# EAGLE board PCB (EAGLE 9.7.0)
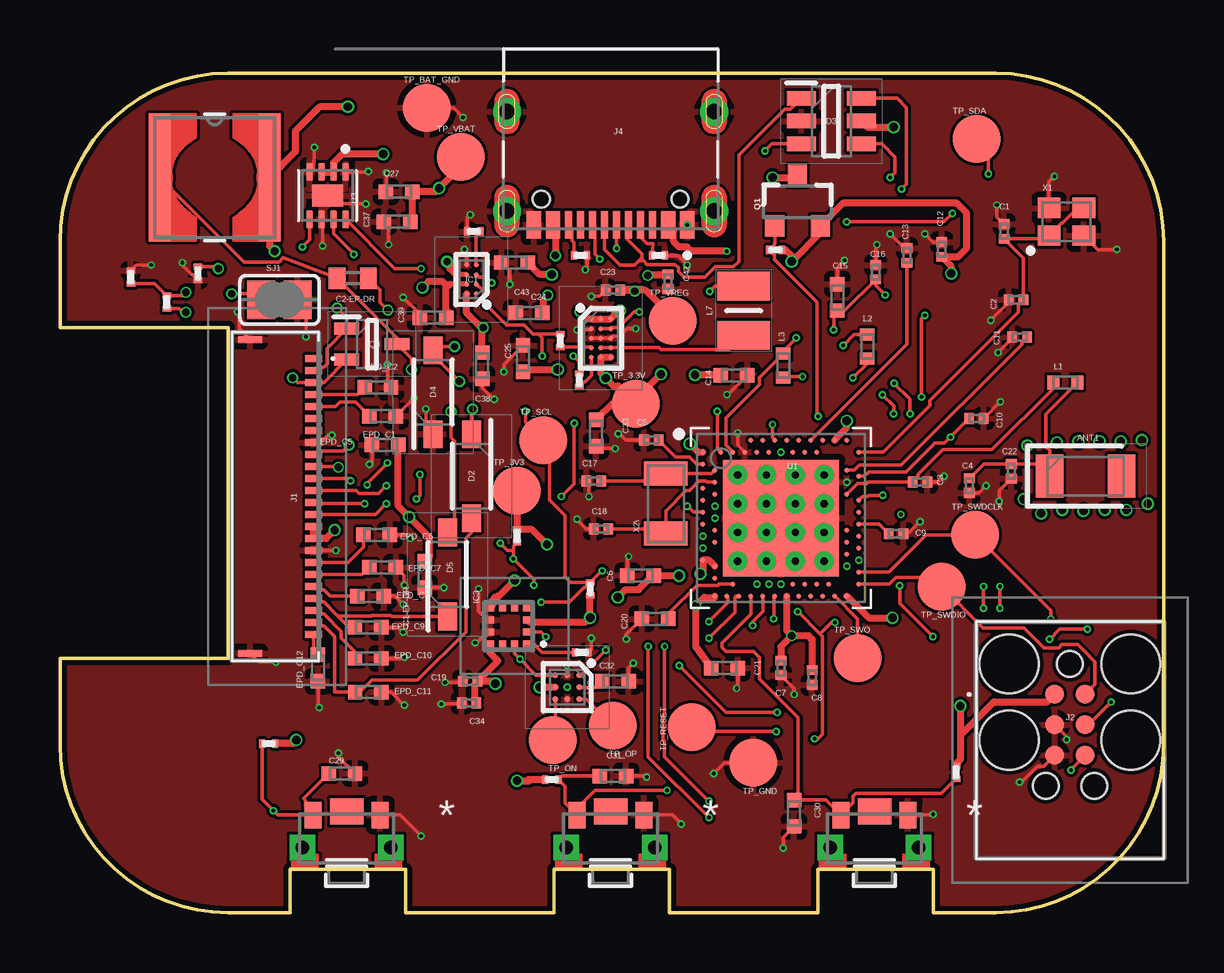
[diagram p0: board, top side]
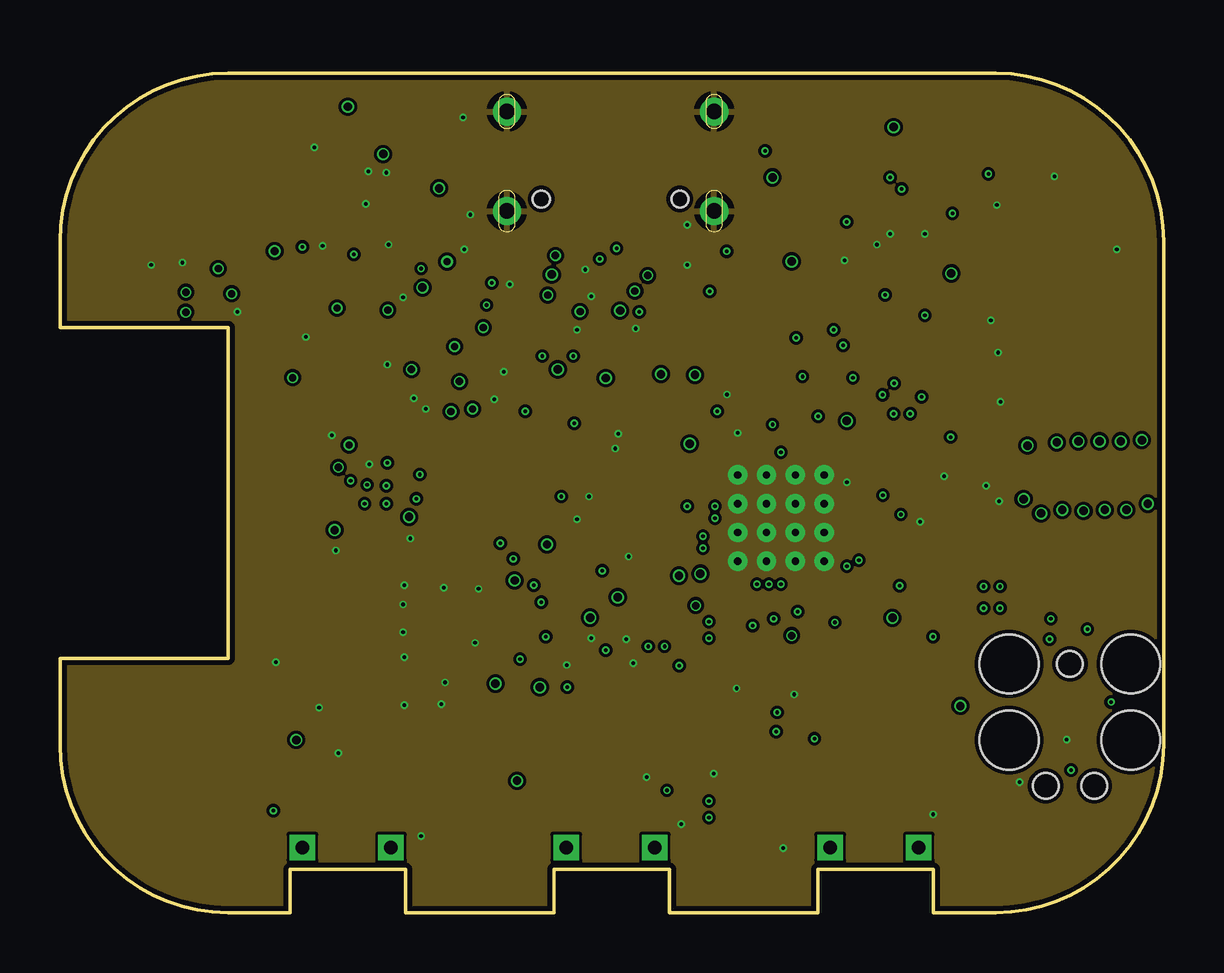
[diagram p1: board, inner layer Route2]
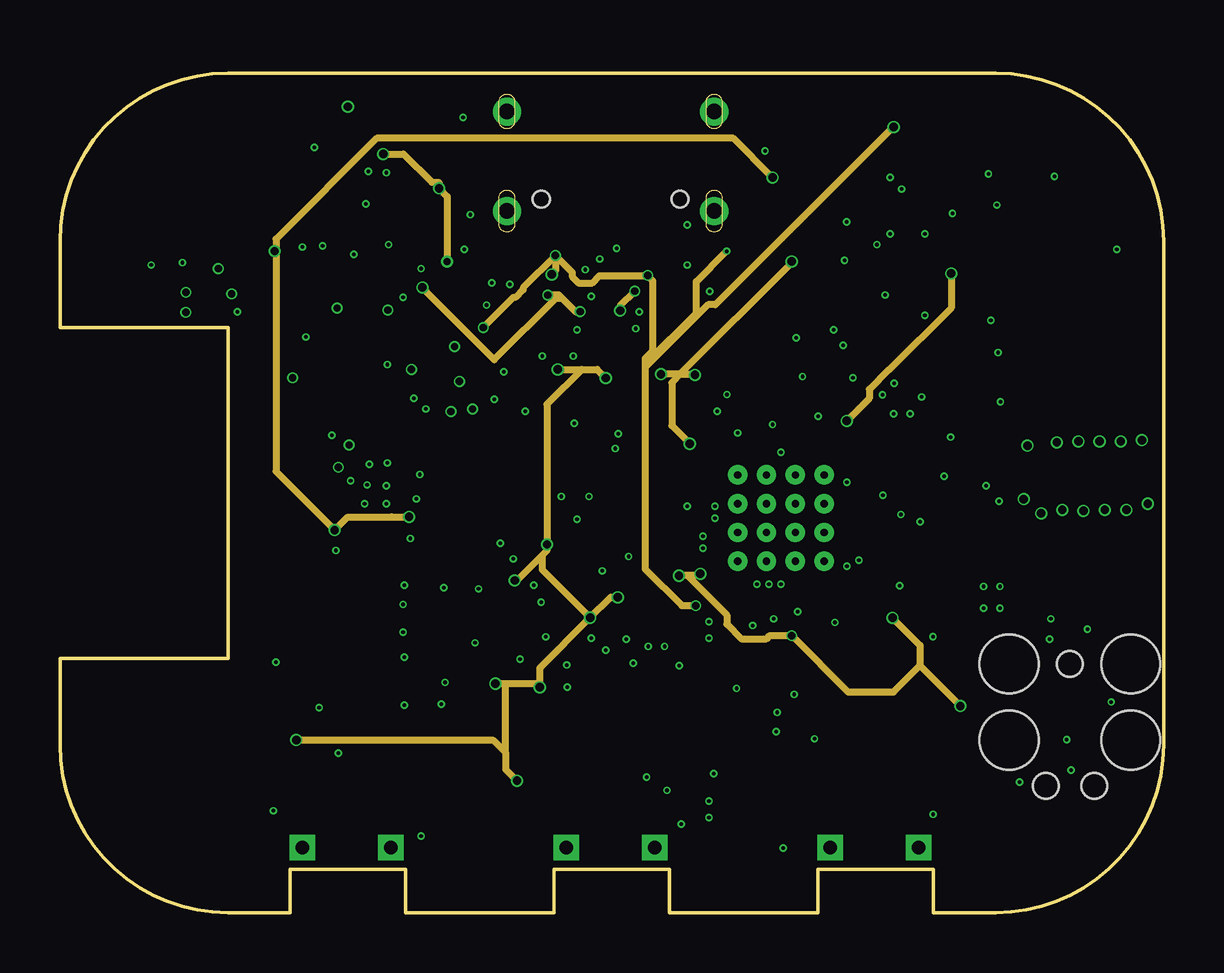
[diagram p2: board, inner layer Route15]
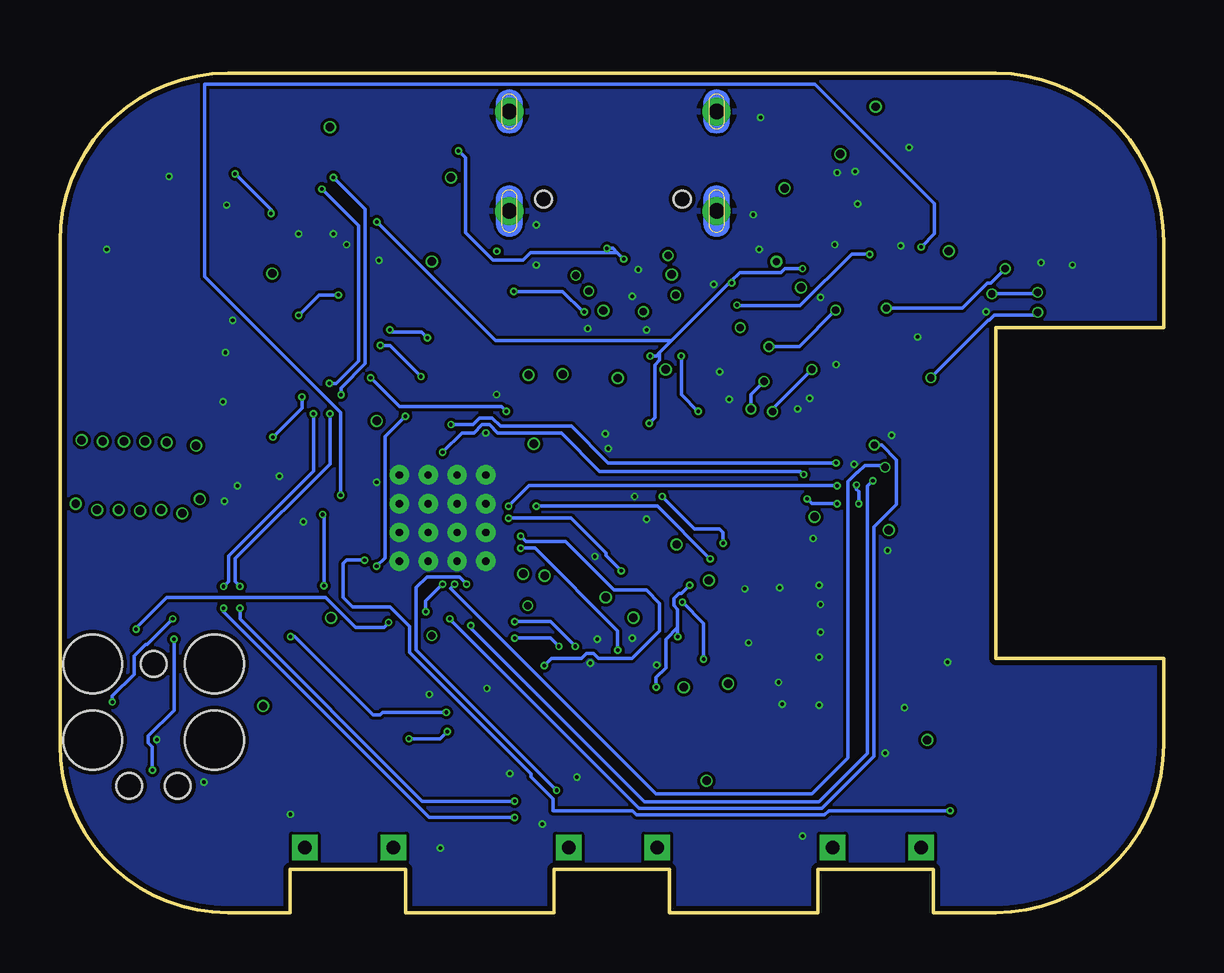
[diagram p3: board, bottom side, seen from below]

Size 46 x 35 mm. Coordinates in mm from the lower left corner, seen from the top.
Outline: 39,0 36.4,0 36.4,1.8 31.6,1.8 31.6,0 25.4,0 25.4,1.8 20.6,1.8 20.6,0 14.4,0 14.4,1.8 9.6,1.8 9.6,0 7,0 arc-90 0,7 0,10.6 7,10.6 7,24.4 0,24.4 0,28 arc-90 7,35 39,35 arc-90 46,28 46,7 arc-90 39,0
Copper layers (1+2*15+16): Top 0.035mm / dielectric 1.6mm / Route2 0.035mm / dielectric 0.15mm / Route15 0.035mm / dielectric 0.2mm / Bottom 0.035mm
Design rules "jlcpcb-2layers.dru *": minimum track width 5mil, minimum drill 0.15mm, track to track 5mil, track to pad 5mil, pad to pad 5mil, via to via 5mil, smd to smd 5mil, copper to edge 0.2mm, drill to drill 6mil, minimum pad ring 10mil, minimum via ring 3mil, stop-mask expansion 4mil, vias tented up to drill 0mil, thermal gap 10mil
Net classes: 1 TRASEEPUTERE: width 0.15 mm

## Footprints (pad centres in the part's own frame; a part is rotated, then mirrored left to right if it is on the bottom)
2450AT18B100E_ANTC3216X140N = smd 1.15 x 1.8: 1 -1.5,0; 2 1.5,0
NORDIC_NRF_3_RESC0201_N = smd 0.4 x 0.45: 1 -0.305,0; 2 0.305,0
NORDIC_NRF_3_RESC0402_N = smd 0.6 x 0.6: 1 -0.55,0; 2 0.55,0
ESP32_C6_LIBRARY_1_ESP32_WROVER_EAGLE-LTSPICE_C0402 = smd 0.7 x 0.9: 1 -0.65,0; 2 0.65,0
ESP32_C6_LIBRARY_5_SOD3716X135N = smd 1.15 x 0.8: 1 -1.75,0; 2 1.75,0
ESP32_C6_LIBRARY_3_SOT95P280X145-6N = smd 1.2 x 0.6: 1 -1.25,0.95; 2 -1.25,0; 3 -1.25,-0.95; 4 1.25,-0.95; 5 1.25,0; 6 1.25,0.95
BQ25180YBGR_BGA8C40P2X4_100X155X50 = smd 0.2 x 0.2: A1 -0.2,0.6; A2 0.2,0.6; B1 -0.2,0.2; B2 0.2,0.2; C1 -0.2,-0.2; C2 0.2,-0.2; D1 -0.2,-0.6; D2 0.2,-0.6
DRV2605YZFR_BGA9C50P3X3_144X144X62 = smd 0.25 x 0.25: A1 -0.5,0.5; A2 0,0.5; A3 0.5,0.5; B1 -0.5,0; B2 0,0; B3 0.5,0; C1 -0.5,-0.5; C2 0,-0.5; C3 0.5,-0.5
BMA423_BMA423 = smd 0.3 x 0.35: 1 -0.75,-0.775; 2 -0.25,-0.775; 3 0.25,-0.775; 4 0.75,-0.775; 7 0.75,0.775; 8 0.25,0.775; 9 -0.25,0.775; 10 -0.75,0.775 | smd 0.35 x 0.3: 5 0.775,-0.25; 6 0.775,0.25; 11 -0.775,0.25; 12 -0.775,-0.25
RT6160AWSC_BGA15C40P3X5_140X230X60 = smd 0.216 x 0.216: A1 -0.4,0.8; A2 0,0.8; A3 0.4,0.8; B1 -0.4,0.4; B2 0,0.4; B3 0.4,0.4; C1 -0.4,0; C2 0,0; C3 0.4,0; D1 -0.4,-0.4; D2 0,-0.4; D3 0.4,-0.4; E1 -0.4,-0.8; E2 0,-0.8; E3 0.4,-0.8
503480-2400_5034802400 = smd 0.3 x 0.7: 1 -5.75,1.525; 2 -5.25,1.525; 3 -4.75,1.525; 4 -4.25,1.525; 5 -3.75,1.525; 6 -3.25,1.525; 7 -2.75,1.525; 8 -2.25,1.525; 9 -1.75,1.525; 10 -1.25,1.525; 11 -0.75,1.525; 12 -0.25,1.525; 13 0.25,1.525; 14 0.75,1.525; 15 1.25,1.525; 16 1.75,1.525; 17 2.25,1.525; 18 2.75,1.525; 19 3.25,1.525; 20 3.75,1.525; 21 4.25,1.525; 22 4.75,1.525; 23 5.25,1.525; 24 5.75,1.525 | smd 0.3 x 1: MP1 -6.54,-1.125; MP2 6.54,-1.125
TC2030-IDC_TC2030IDC = smd 0.783 x 0.783: 1 -0.953,-0.635; 2 -0.953,0.635; 3 0.317,-0.635; 4 0.317,0.635; 5 1.588,-0.635; 6 1.588,0.635 | hole 2.451: -2.223,-2.54; -2.223,2.54; 0.952,-2.54; 0.952,2.54 | hole 1.067: -2.223,0; 2.857,-1.016; 2.857,1.016
KH-TYPE-C-16P_KINGHELM_KH-TYPE-C-16P = smd 0.6 x 1.15: A1_B12 -3.2,4.725; A4_B9 -2.4,4.725; A9_B4 2.4,4.725; A12_B1 3.2,4.725 | smd 0.3 x 1.15: A5 -1.25,4.725; A6 -0.25,4.725; A7 0.25,4.725; A8 1.25,4.725; B5 1.75,4.725; B6 0.75,4.725; B7 -0.75,4.725; B8 -1.75,4.725 | drill 0.65 pad 1.05: SH1 -4.32,0; SH2 4.32,0; SH3 -4.32,4.15; SH4 4.32,4.15 | hole 0.7: -2.89,3.65; 2.89,3.65
NORDIC_NRF_2_RESC0402_L = smd 0.5 x 0.6: 1 -0.5,0; 2 0.5,0
ESP32_C6_LIBRARY_2_IND_4828-WE-TPC_WRE = smd 0.9 x 5.3: 1 -2.286,0; 2 2.286,0
MLP2016SR47MT0S1_INDC2016X100N = smd 1.2 x 2.2: 1 -1.028,0; 2 1.028,0
ESP32_C6_LIBRARY_4_ESP32_C6_LIBRARY_4_ESP32_C6_LIBRARY_4_ESP32_C6_LIBRARY_4_ESP32_WROVER_SPARKFUN-DISCRETESEMI_SOT23-3 = smd 0.8 x 0.9: 1 -0.95,-1; 2 0.95,-1; 3 0,1.1
ESP32_C6_LIBRARY_6_SOT65P210X110-3N = smd 1.05 x 0.5: 1 -1.05,0.65; 2 -1.05,-0.65; 3 1.05,0
CPF0201D7K68C1_0201 = smd 0.35 x 0.25: 1 0,0.275; 2 0,-0.275
ESP32_C6_LIBRARY_7_JUMPER_SJ = smd 1.168 x 1.6: 1 -0.762,0; 2 0.762,0
2025-10-22_07-23-44_LIBRARY_SW_EVP-AKE31A_PAN = smd 0.711 x 1.092: 1 -1.4,-0.972; 2 1.4,-0.972 | drill 0.559 pad 0.914 square: 3 -1.848,0.381; 4 1.848,0.381 | smd 1.397 x 1.092: 5 0,-1.124
HECTOR_WATCH_1_TP20R = smd 2 x 2: TP 0,0
NORDIC_NRF_4_AQFN50P700X700X85_HS-74N = smd 4.85 x 4.85: P$74 0,0 | drill 0.3 pad 0.6: P$75 -1.8,1.8; P$76 -0.6,1.8; P$77 0.6,1.8; P$78 1.8,1.8; P$79 -1.8,0.6; P$80 -0.6,0.6; P$81 0.6,0.6; P$82 1.8,0.6; P$83 -1.8,-0.6; P$84 -0.6,-0.6; P$85 0.6,-0.6; P$86 1.8,-0.6; P$87 -1.8,-1.8; P$88 -0.6,-1.8; P$89 0.6,-1.8; P$90 1.8,-1.8 | smd 0.2 x 0.2: P$A8 -1.25,3.25; P$A10 -0.75,3.25; P$A12 -0.25,3.25; P$A14 0.25,3.25; P$A16 0.75,3.25; P$A18 1.25,3.25; P$A20 1.75,3.25; P$A22 2.25,3.25; P$A23 2.75,3.25; P$AA24 3.25,-2.25; P$AB2 -2.75,-2.5; P$AC5 -2,-2.75; P$AC9 -1,-2.75; P$AC11 -0.5,-2.75; P$AC13 0,-2.75; P$AC15 0.5,-2.75; P$AC17 1,-2.75; P$AC19 1.5,-2.75; P$AC21 2,-2.75; P$AC24 3.25,-2.75; P$AD2 -2.75,-3.25; P$AD4 -2.25,-3.25; P$AD6 -1.75,-3.25; P$AD8 -1.25,-3.25; P$AD10 -0.75,-3.25; P$AD12 -0.25,-3.25; P$AD14 0.25,-3.25; P$AD16 0.75,-3.25; P$AD18 1.25,-3.25; P$AD20 1.75,-3.25; P$AD22 2.25,-3.25; P$AD23 2.75,-3.25; P$B1 -3.25,2.75; P$B3 -2.5,2.75; P$B5 -2,2.75; P$B7 -1.5,2.75; P$B9 -1,2.75; P$B11 -0.5,2.75; P$B13 0,2.75; P$B15 0.5,2.75; P$B17 1,2.75; P$B19 1.5,2.75; P$B24 3.25,2.75; P$C1 -3.25,2.25; P$D2 -2.75,2; P$D23 2.75,2; P$E24 3.25,1.75; P$F2 -2.75,1.5; P$F23 2.75,1.5; P$G1 -3.25,1.25; P$H2 -2.75,1; P$H23 2.75,1; P$J1 -3.25,0.75; P$J24 3.25,0.75; P$K2 -2.75,0.5; P$L1 -3.25,0.25; P$L24 3.25,0.25; P$M2 -2.75,0; P$N1 -3.25,-0.25; P$N24 3.25,-0.25; P$P2 -2.75,-0.5; P$P23 2.75,-0.5; P$R1 -3.25,-0.75; P$R24 3.25,-0.75; P$T2 -2.75,-1; P$T23 2.75,-1; P$U1 -3.25,-1.25; P$U24 3.25,-1.25; P$V23 2.75,-1.5; P$W1 -3.25,-1.75; P$W24 3.25,-1.75; P$Y2 -2.75,-2; P$Y23 2.75,-2
ESP32_C6_LIBRARY_SON50P200X200X80-9N = smd 0.76 x 0.27: 1 -0.985,0.75; 2 -0.985,0.25; 3 -0.985,-0.25; 4 -0.985,-0.75; 5 0.985,-0.75; 6 0.985,-0.25; 7 0.985,0.25; 8 0.985,0.75 | smd 0.9 x 1.3: 9 0,0
NORDIC_NRF_BT-XTAL_2016_N = smd 0.95 x 0.85: 1 -0.725,-0.575; 2 0.725,-0.575; 3 0.725,0.575; 4 -0.725,0.575
NORDIC_NRF_1_XTAL_3215_N = smd 1 x 1.8: 1 -1.25,0; 2 1.25,0

## Placement (x,y rotation side)
ANT1  2450AT18B100E  [2450AT18B100E_ANTC3216X140N]  42.75,18.2 0 top
C1  12pF  [NORDIC_NRF_3_RESC0201_N]  39.35,28.4 90 top
C1-EP-DR  10uF  [NORDIC_NRF_3_RESC0402_N]  15.2,14.1 270 top
C2  12pF  [NORDIC_NRF_3_RESC0201_N]  39.85,25.55 180 top
C2-EP-DR  4.7uF/25V  [ESP32_C6_LIBRARY_1_ESP32_WROVER_EAGLE-LTSPICE_C0402]  12.2,26.45 180 top
C3  1pF  [NORDIC_NRF_3_RESC0201_N]  35.85,17.95 180 top
C4  1pF  [NORDIC_NRF_3_RESC0201_N]  37.9,17.8 90 top
C5  100nF  [NORDIC_NRF_3_RESC0201_N]  24.65,19.7 180 top
C6  1uF  [NORDIC_NRF_3_RESC0402_N]  24.2,14.05 180 top
C7  100nF  [NORDIC_NRF_3_RESC0201_N]  30.05,10.2 270 top
C8  100nF  [NORDIC_NRF_3_RESC0201_N]  31.35,9.8 270 top
C9  820pF  [NORDIC_NRF_3_RESC0201_N]  34.85,15.8 180 top
C10  N.C.  [NORDIC_NRF_3_RESC0201_N]  38.2,20.6 180 top
C11  100pF  [NORDIC_NRF_3_RESC0201_N]  40,24 0 top
C12  100nF  [NORDIC_NRF_3_RESC0201_N]  36.75,27.65 270 top
C13  N.C.  [NORDIC_NRF_3_RESC0201_N]  35.3,27.4 270 top
C14  4.7uF  [NORDIC_NRF_3_RESC0402_N]  28.1,22.4 0 top
C15  1uF  [NORDIC_NRF_3_RESC0402_N]  32.4,25.65 90 top
C16  47nF  [NORDIC_NRF_3_RESC0201_N]  34,26.7 270 top
C17  12pF  [NORDIC_NRF_3_RESC0201_N]  22.25,18 0 top
C18  12pF  [NORDIC_NRF_3_RESC0201_N]  22.55,16 0 top
C19  100nF  [NORDIC_NRF_3_RESC0201_N]  17.1,9.65 0 top
C20  1uF  [NORDIC_NRF_3_RESC0402_N]  24.8,12.25 180 top
C21  1uF  [NORDIC_NRF_3_RESC0402_N]  27.7,10.2 0 top
C22  N.C.  [NORDIC_NRF_3_RESC0201_N]  39.65,18.4 90 top
C23  0.1uF  [NORDIC_NRF_3_RESC0201_N]  23.05,25.95 0 top
C24  10uF  [NORDIC_NRF_3_RESC0402_N]  19.55,25 0 top
C25  22uF  [NORDIC_NRF_3_RESC0402_N]  19.3,23.1 90 top
C27  0.1uF  [NORDIC_NRF_3_RESC0402_N]  14.14,30.05 0 top
C29  1uF  [NORDIC_NRF_3_RESC0402_N]  11.75,5.8 0 top
C30  1uF  [NORDIC_NRF_3_RESC0402_N]  30.6,4.15 90 top
C31  1uF  [NORDIC_NRF_3_RESC0402_N]  23.05,5.7 180 top
C32  1uF  [NORDIC_NRF_3_RESC0402_N]  23.15,9.65 180 top
C33  22uF  [NORDIC_NRF_3_RESC0402_N]  22.35,20 270 top
C34  0.1uF  [NORDIC_NRF_3_RESC0201_N]  17.05,8.75 180 top
C37  1uF  [NORDIC_NRF_3_RESC0402_N]  14.05,28.8 180 top
C38  1uF  [NORDIC_NRF_3_RESC0402_N]  17.6,22.8 270 top
C39  10uF  [NORDIC_NRF_3_RESC0402_N]  15.55,24.8 180 top
C42  0.1uF  [NORDIC_NRF_3_RESC0201_N]  25.35,26.3 270 top
C43  4.7uF  [NORDIC_NRF_3_RESC0402_N]  18.95,27.1 180 top
D2  MBR0530  [ESP32_C6_LIBRARY_5_SOD3716X135N]  17.15,18.2 270 top
D3  USBLC6-2SC6Y  [ESP32_C6_LIBRARY_3_SOT95P280X145-6N]  32.15,33 0 top
D4  MBR0530  [ESP32_C6_LIBRARY_5_SOD3716X135N]  15.55,21.7 90 top
D5  MBR0530  [ESP32_C6_LIBRARY_5_SOD3716X135N]  16.15,14.1 90 top
EPD_C1  1uF/50V  [NORDIC_NRF_3_RESC0402_N]  13.45,20.7 180 top
EPD_C2  1uF/50V  [NORDIC_NRF_3_RESC0402_N]  13.25,21.9 180 top
EPD_C5  0.1uF/50V  [NORDIC_NRF_3_RESC0402_N]  13.55,19.5 0 top
EPD_C6  1uF/50V  [NORDIC_NRF_3_RESC0402_N]  13.2,15.75 180 top
EPD_C7  1uF/50V  [NORDIC_NRF_3_RESC0402_N]  13.45,14.4 180 top
EPD_C8  1uF/50V  [NORDIC_NRF_3_RESC0402_N]  12.95,13.2 180 top
EPD_C9  1uF/50V  [NORDIC_NRF_3_RESC0402_N]  12.85,11.9 180 top
EPD_C10  1uF/50V  [NORDIC_NRF_3_RESC0402_N]  12.85,10.6 180 top
EPD_C11  1uF/50V  [NORDIC_NRF_3_RESC0402_N]  12.85,9.2 180 top
EPD_C12  1uF/50V  [NORDIC_NRF_3_RESC0402_N]  10.75,10.2 90 top
IC1  BQ25180YBGR  [BQ25180YBGR_BGA8C40P2X4_100X155X50]  17.15,26.4 180 top
IC2  DRV2605YZFR  [DRV2605YZFR_BGA9C50P3X3_144X144X62]  21.15,9.4 270 top
IC3  BMA423_BMA423  [BMA423_BMA423]  18.7,11.95 90 top
IC9  RT6160AWSC_RT6160AWSC  [RT6160AWSC_BGA15C40P3X5_140X230X60]  22.55,23.95 0 top
J1  503480-2400  [503480-2400_5034802400]  9.05,17.35 270 top
J2  TC2030-IDC_TC2030-IDCCABLU  [TC2030-IDC_TC2030IDC]  42.1,8.15 270 top
J4  KH-TYPE-C-16P  [KH-TYPE-C-16P_KINGHELM_KH-TYPE-C-16P]  22.95,33.4 180 top
L1  3.9nH  [NORDIC_NRF_2_RESC0402_L]  41.9,22.1 0 top
L2  10uH  [NORDIC_NRF_2_RESC0402_L]  33.65,23.6 90 top
L3  15nH  [NORDIC_NRF_2_RESC0402_L]  30.15,22.8 90 top
L5  68uH  [ESP32_C6_LIBRARY_2_IND_4828-WE-TPC_WRE]  6.45,30.65 0 top
L7  FTC252012SR47MBCA  [MLP2016SR47MT0S1_INDC2016X100N]  28.5,25.1 270 top
Q1  20V/4.2A/52mΩ/1.4W  [ESP32_C6_LIBRARY_4_ESP32_C6_LIBRARY_4_ESP32_C6_LIBRARY_4_ESP32_C6_LIBRARY_4_ESP32_WROVER_SPARKFUN-DISCRETESEMI_SOT23-3]  30.74,29.63 0 top
Q3  SI1308EDL-T1-GE3  [ESP32_C6_LIBRARY_6_SOT65P210X110-3N]  13,23.7 0 top
R1_EP_DR  0.47  [CPF0201D7K68C1_0201]  4.45,25.45 0 top
R1_USB  5K1  [CPF0201D7K68C1_0201]  24.95,27.4 270 top
R2  0  [CPF0201D7K68C1_0201]  21.65,22.2 0 top
R2_EP_DR  10k  [CPF0201D7K68C1_0201]  5.75,26.65 180 top
R2_USB  5K1  [CPF0201D7K68C1_0201]  21.7,27.4 90 top
R3  0  [CPF0201D7K68C1_0201]  21.75,10.85 270 top
R4  0  [CPF0201D7K68C1_0201]  20.85,23.85 0 top
R5  10K  [CPF0201D7K68C1_0201]  37.35,5.85 180 top
R7  10K  [CPF0201D7K68C1_0201]  8.7,7.05 90 top
R8  10K  [CPF0201D7K68C1_0201]  20.5,5.55 270 top
R9  10k  [CPF0201D7K68C1_0201]  17.25,28.4 90 top
R17  3K3  [CPF0201D7K68C1_0201]  22.1,13.5 180 top
R18  3K3  [CPF0201D7K68C1_0201]  19.05,15.7 0 top
R_PWR_EPD  10k  [CPF0201D7K68C1_0201]  29.83,27.63 90 top
R_TYPE_SEL  2.2  [CPF0201D7K68C1_0201]  2.95,26.5 0 top
SJ1  [ESP32_C6_LIBRARY_7_JUMPER_SJ]  9.15,25.55 180 top
SW_DN  2025-10-22_07-23-44_LIBRARY_EVP-AKE31ASW_EVP-AKE31A_PAN  [2025-10-22_07-23-44_LIBRARY_SW_EVP-AKE31A_PAN]  11.95,3.1 180 top
SW_ENT  2025-10-22_07-23-44_LIBRARY_EVP-AKE31ASW_EVP-AKE31A_PAN  [2025-10-22_07-23-44_LIBRARY_SW_EVP-AKE31A_PAN]  22.95,3.1 180 top
SW_UP  2025-10-22_07-23-44_LIBRARY_EVP-AKE31ASW_EVP-AKE31A_PAN  [2025-10-22_07-23-44_LIBRARY_SW_EVP-AKE31A_PAN]  33.95,3.1 180 top
TP_3.3V  HECTOR_WATCH_1_TPTP20R  [HECTOR_WATCH_1_TP20R]  24,21.22 0 top
TP_3V3  HECTOR_WATCH_1_TPTP20R  [HECTOR_WATCH_1_TP20R]  19.05,17.6 0 top
TP_BAT_GND  HECTOR_WATCH_1_TPTP20R  [HECTOR_WATCH_1_TP20R]  15.3,33.55 0 top
TP_GND  HECTOR_WATCH_1_TPTP20R  [HECTOR_WATCH_1_TP20R]  28.9,6.25 180 top
TP_ON  HECTOR_WATCH_1_TPTP20R  [HECTOR_WATCH_1_TP20R]  20.55,7.2 180 top
TP_OP  HECTOR_WATCH_1_TPTP20R  [HECTOR_WATCH_1_TP20R]  23.05,7.8 180 top
TP_RESET  HECTOR_WATCH_1_TPTP20R  [HECTOR_WATCH_1_TP20R]  26.33,7.73 90 top
TP_SCL  HECTOR_WATCH_1_TPTP20R  [HECTOR_WATCH_1_TP20R]  20.15,19.7 0 top
TP_SDA  HECTOR_WATCH_1_TPTP20R  [HECTOR_WATCH_1_TP20R]  38.2,32.25 0 top
TP_SWDCLK  HECTOR_WATCH_1_TPTP20R  [HECTOR_WATCH_1_TP20R]  38.15,15.75 0 top
TP_SWDIO  HECTOR_WATCH_1_TPTP20R  [HECTOR_WATCH_1_TP20R]  36.75,13.6 180 top
TP_SWO  HECTOR_WATCH_1_TPTP20R  [HECTOR_WATCH_1_TP20R]  33.25,10.62 0 top
TP_VBAT  HECTOR_WATCH_1_TPTP20R  [HECTOR_WATCH_1_TP20R]  16.7,31.5 0 top
TP_VREG  HECTOR_WATCH_1_TPTP20R  [HECTOR_WATCH_1_TP20R]  25.55,24.67 0 top
U1  NRF52840_QF  [NORDIC_NRF_4_AQFN50P700X700X85_HS-74N]  30.05,16.45 0 top
U3  MAX17048G+T10  [ESP32_C6_LIBRARY_SON50P200X200X80-9N]  11.15,29.89 270 top
X1  32MHZ  [NORDIC_NRF_BT-XTAL_2016_N]  41.95,28.8 0 top
X2\  32.768kHz  [NORDIC_NRF_1_XTAL_3215_N]  25.25,17.05 270 top

## Library data of the parts
ANT1 = InkTime_v5; ARROW_PART_NUMBER: 2450AT18B100E; ARROW_PRICE-STOCK: https://www.arrow.com/en/products/2450at18b100e/johanson-dielectrics?utm_currency=USD&region=nac; DESCRIPTION: Antennas 2.45GHz ANTENNA; HEIGHT: 1.4mm; MANUFACTURER_NAME: JOHANSON TECHNOLOGY; MANUFACTURER_PART_NUMBER: 2450AT18B100E; MOUSER_PART_NUMBER: 609-2450AT18B100E; MOUSER_PRICE-STOCK: https://www.mouser.co.uk/ProductDetail/Johanson-Technology/2450AT18B100E?qs=yCnrNFeXz%252Bh5MFsFIXGZGA%3D%3D
C1 C1-EP-DR C2-C25 C27 C29-C34 C37-C39 C42 C43 EPD_C1 EPD_C2 EPD_C5-EPD_C12 J2 L1-L3 R1_EP_DR R1_USB R2 R2_EP_DR R2_USB R3-R5 R7-R9 R17 R18 R_PWR_EPD R_TYPE_SEL SJ1 SW_DN SW_ENT SW_UP TP_3.3V TP_3V3 TP_BAT_GND TP_GND TP_ON TP_OP TP_RESET TP_SCL TP_SDA TP_SWDCLK TP_SWDIO TP_SWO TP_VBAT TP_VREG U1 U3 X1 X2\ = InkTime_v5
C2-EP-DR = InkTime_v5; SPICEMODEL: NONE; SPICEPREFIX: C
D2 D4 D5 = InkTime_v5; AVAILABILITY: In Stock; CHECK_PRICES: https://www.snapeda.com/parts/MBR0530/Onsemi/view-part/?ref=eda; DESCRIPTION: Diode Schottky 30 V 500mA Surface Mount SOD-123; MF: ON Semiconductor; MP: MBR0530; PACKAGE: SOD-123-2 ON Semiconductor; PRICE: None; PURCHASE-URL: https://www.snapeda.com/api/url_track_click_mouser/?unipart_id=179458&manufacturer=ON Semiconductor&part_name=MBR0530&search_term=None; SNAPEDA_LINK: https://www.snapeda.com/parts/MBR0530/Onsemi/view-part/?ref=snap
D3 = InkTime_v5; AVAILABILITY: In Stock; CHECK_PRICES: https://www.snapeda.com/parts/USBLC6-2SC6Y/STMicroelectronics/view-part/?ref=eda; DESCRIPTION: 17V Clamp 5A (8/20µs) Ipp Tvs Diode Surface Mount SOT-23-6; MF: STMicroelectronics; MP: USBLC6-2SC6Y; PACKAGE: SOT-23-6 STMicroelectronics; PRICE: None; SNAPEDA_LINK: https://www.snapeda.com/parts/USBLC6-2SC6Y/STMicroelectronics/view-part/?ref=snap
IC1 = InkTime_v5; ARROW_PART_NUMBER: BQ25180YBGR; ARROW_PRICE-STOCK: https://www.arrow.com/en/products/bq25180ybgr/texas-instruments?utm_currency=USD&region=nac; DESCRIPTION: Charger IC Lithium Ion/Polymer, Lithium Iron Phosphate 8-DSBGA (1.6x1.1); HEIGHT: 0.5mm; MANUFACTURER_NAME: Texas Instruments; MANUFACTURER_PART_NUMBER: BQ25180YBGR; MOUSER_PART_NUMBER: 595-BQ25180YBGR; MOUSER_PRICE-STOCK: https://www.mouser.co.uk/ProductDetail/Texas-Instruments/BQ25180YBGR?qs=doiCPypUmgEWjAK%252BJAX6Tw%3D%3D
IC2 = InkTime_v5; ARROW_PART_NUMBER: DRV2605YZFR; ARROW_PRICE-STOCK: https://www.arrow.com/en/products/drv2605yzfr/texas-instruments?region=nac; DESCRIPTION: Haptic Driver for ERM/LRA with Built-In Library and Smart Loop Architecture; HEIGHT: 0.625mm; MANUFACTURER_NAME: Texas Instruments; MANUFACTURER_PART_NUMBER: DRV2605YZFR
IC3 = InkTime_v5; ARROW_PART_NUMBER: BMA423; ARROW_PRICE-STOCK: https://www.arrow.com/en/products/bma423/bosch; DESCRIPTION: Accelerometers Triaxial low-g 12bit Acceleration Sensor; HEIGHT: 1mm; MANUFACTURER_NAME: BOSCH; MANUFACTURER_PART_NUMBER: BMA423; MOUSER_PART_NUMBER: 262-BMA423; MOUSER_PRICE-STOCK: https://www.mouser.co.uk/ProductDetail/Bosch-Sensortec/BMA423?qs=HXFqYaX1Q2xC%252BSgeGoX3mg%3D%3D
IC9 = InkTime_v5; DESCRIPTION: Buck-Boost Regulator Positive Output Step-Up/Step-Down I2C DC-DC Controller IC 15-WL-CSP (BSC) (1.4x2.3); HEIGHT: 0.6mm; MANUFACTURER_NAME: RICHTEK; MANUFACTURER_PART_NUMBER: RT6160AWSC; MOUSER_PART_NUMBER: 835-RT6160AWSC; MOUSER_PRICE-STOCK: https://www.mouser.co.uk/ProductDetail/Richtek/RT6160AWSC?qs=amGC7iS6iy%2FLd9PSoixZXQ%3D%3D
J1 = InkTime_v5; DESCRIPTION: FFC & FPC Connectors 0.5mm FPC RA SMT Dual Contact 24Ckt; HEIGHT: 1.87mm; MANUFACTURER_NAME: Molex; MANUFACTURER_PART_NUMBER: 503480-2400; MOUSER_PART_NUMBER: 538-503480-2400; MOUSER_PRICE-STOCK: https://www.mouser.co.uk/ProductDetail/Molex/503480-2400?qs=OAhjpuo3Vu7efIoxFh9AOw%3D%3D
J4 = InkTime_v5; AVAILABILITY: Not in stock; CHECK_PRICES: https://www.snapeda.com/parts/KH-TYPE-C-16P/Kinghelm/view-part/?ref=eda; MF: kinghelm; MP: KH-TYPE-C-16P; PACKAGE: None; PRICE: None; SNAPEDA_LINK: https://www.snapeda.com/parts/KH-TYPE-C-16P/Kinghelm/view-part/?ref=snap
L5 = InkTime_v5; COPYRIGHT: Copyright (C) 2024 Ultra Librarian. All rights reserved.; MANUFACTURER_PART_NUMBER: 744043680; MFR_NAME: Wurth Electronics
L7 = InkTime_v5; DESCRIPTION: SMD / SMT Inductors (Coils), L=0.47?H, L x W x T :; HEIGHT: 1mm; JLCPCB: https://jlcpcb.com/partdetail/6763488-FTC252012SR47MBCA/C5832368; MANUFACTURER_NAME: TDK; MANUFACTURER_PART_NUMBER: FTC252012SR47MBCA
Q1 = InkTime_v5; PROD_ID: TRAN-14388
Q3 = InkTime_v5; AVAILABILITY: In Stock; CHECK_PRICES: https://www.snapeda.com/parts/SI1308EDL-T1-GE3/Vishay+Siliconix/view-part/?ref=eda; DESCRIPTION: Si1308EDL-T1-GE3 N-channel MOSFET Transistor, 1.5 A, 30 V, 3-Pin SC-70 | Siliconix / Vishay SI1308EDL-T1-GE3; MF: Vishay Siliconix; MP: SI1308EDL-T1-GE3; PACKAGE: SOT-323 Vishay Semiconductor; PRICE: None; PURCHASE-URL: https://www.snapeda.com/api/url_track_click_mouser/?unipart_id=274603&manufacturer=Vishay Siliconix&part_name=SI1308EDL-T1-GE3&search_term=None; SNAPEDA_LINK: https://www.snapeda.com/parts/SI1308EDL-T1-GE3/Vishay+Siliconix/view-part/?ref=snap

## Nets
3V3 [TRASEEPUTERE]: C6.1 C7.1 C8.1 C12.2 C14.1 C19.2 C25.1 C33.1 C34.1 IC2.C2 IC3.3 IC3.7 IC3.10 IC9.E2 IC9.E3 J2.1 Q1.2 R5.2 R7.2 R8.2 R17.1 R18.1 R_PWR_EPD.2 TP_3.3V.TP TP_3V3.TP U1.P$A22 U1.P$AD14 U1.P$AD23 U1.P$B1 U1.P$W1 U1.P$Y2
ALERT: U1.P$J24 U3.5
D_N: D3.6 U1.P$AD4
D_P: D3.4 U1.P$AD6
DN: D3.1 J4.A7 J4.B7
DP: D3.3 J4.A6 J4.B6
EPD_3V3 [TRASEEPUTERE]: C1-EP-DR.1 EPD_C5.2 J1.15 J1.16 L5.2 Q1.3
EPD_BUSY: J1.9 U1.P$AD12
EPD_CS: J1.12 U1.P$K2
EPD_DC: J1.11 U1.P$AD10
EPD_RST: J1.10 U1.P$AC11
GDR: J1.2 Q3.1 R2_EP_DR.2
GND: C1-EP-DR.2 C1.2 C2.2 C3.1 C4.1 C5.2 C6.2 C7.2 C8.2 C9.1 C10.1 C11.1 C12.1 C13.1 C14.2 C15.2 C16.1 C17.1 C18.1 C19.1 C20.2 C21.2 C22.1 C23.1 C24.1 C25.2 C27.1 C29.2 C30.1 C31.1 C32.1 C33.2 C34.2 C37.2 C38.2 C39.2 C42.2 C43.2 D3.2 D4.1 EPD_C1.1 EPD_C2.1 EPD_C5.1 EPD_C6.1 EPD_C7.1 EPD_C8.1 EPD_C9.1 EPD_C10.1 EPD_C11.1 EPD_C12.1 IC1.D2 IC2.B1 IC2.B3 IC3.8 IC3.9 IC9.B1 IC9.C1 IC9.C2 IC9.C3 J1.8 J1.17 J1.MP1 J1.MP2 J2.3 J2.5 J4.A1_B12 J4.A12_B1 J4.SH1 J4.SH2 J4.SH3 J4.SH4 R1_USB.1 R2_EP_DR.1 R2_USB.2 R3.1 R9.1 R_TYPE_SEL.1 SJ1.1 SW_DN.1 SW_ENT.1 SW_UP.1 TP_BAT_GND.TP TP_GND.TP U1.P$74 U1.P$75 U1.P$76 U1.P$77 U1.P$78 U1.P$79 U1.P$80 U1.P$81 U1.P$82 U1.P$83 U1.P$84 U1.P$85 U1.P$86 U1.P$87 U1.P$88 U1.P$89 U1.P$90 U1.P$B7 U1.P$F23 U3.1 U3.4 U3.6 U3.9 X1.2 X1.4
HAPTIC_EN: IC2.A1 U1.P$U1
IMU_INT1: U1.P$N1
IMU_INT2: U1.P$P2
LX1: IC9.B2 IC9.B3 L7.1
LX2: IC9.D2 IC9.D3 L7.2
MOSI: J1.14 U1.P$B13
MU_INT1: IC3.5
MU_INT2: IC3.6
N$1: J4.A5 R1_USB.2
N$2: J4.B5 R2_USB.1
N$3: C3.2 L1.1 U1.P$H23
N$4: ANT1.1 C4.2 C22.2 L1.2
N$6: C2-EP-DR.2 D5.2 L5.1 Q3.3
N$8: C11.2 U1.P$D23
N$10: C1.1 C2.1 U1.P$B24 X1.1 X1.3
N$12: EPD_C6.2 J1.18
N$13: EPD_C7.2 J1.19
N$14: EPD_C8.2 J1.20
N$15: C2-EP-DR.1 D2.1 D4.2
N$17: C9.2 U1.P$N24
N$18: EPD_C2.2 J1.4
N$19: L2.1 U1.P$B3
N$20: EPD_C1.2 J1.5
N$22: R1_EP_DR.1 R_TYPE_SEL.2 SJ1.2
N$23: EPD_C10.2 J1.22
N$25: EPD_C12.2 J1.24
N$28: IC1.D1 R9.2
N$29: IC9.D1 R4.2
N$30: IC9.E1 R2.2
N$31: IC3.1 R3.2
N$32: C5.1 U1.P$C1
N$33: C17.2 U1.P$D2 X2\.1
N$34: C20.1 U1.P$AC5
N$35: C18.2 U1.P$F2 X2\.2
N$39: C32.2 IC2.A2
N$40: L2.2 L3.1
N$41: C10.2 C15.1 C16.2 L3.2 U1.P$B5 U1.P$E24
N$52: C13.2 U1.P$A18
OUT+: IC2.A3 TP_OP.TP
OUT-: IC2.C3 TP_ON.TP
P0.04: U1.P$J1
P0.09: U1.P$L24
P0.13: C30.2 R5.1 SW_UP.2 U1.P$AD8
P0.14: C31.2 R8.1 SW_ENT.2 U1.P$AC9
P0.19: U1.P$AC15
P0.20: U1.P$AD16
P0.21: U1.P$AC17
P0.22: U1.P$AD18
P0.23: U1.P$AC19
P0.24: U1.P$AD20
P0.25: U1.P$AC21
P0.26: U1.P$G1
P0.27: U1.P$H2
P0.28: U1.P$B11
P0.29: U1.P$A10
P0.30: U1.P$B9
P0.31: U1.P$A8
P1.01: Q1.1 R_PWR_EPD.1 U1.P$Y23
P1.02: C29.1 R7.1 SW_DN.2 U1.P$W24
P1.03: U1.P$V23
P1.04: U1.P$U24
P1.05: U1.P$T23
P1.06: U1.P$R24
P1.07: U1.P$P23
P1.09: U1.P$R1
P1.10: U1.P$A20
P1.11: U1.P$B19
P1.12: U1.P$B17
P1.13: U1.P$A16
P1.14: U1.P$B15
P1.15: U1.P$A14
PMIC_IN: IC1.A1
PMIC_INT: U1.P$T2
PREVGH: D5.1 EPD_C9.2 J1.21
PREVGL: D2.2 EPD_C11.2 J1.23
RESE: J1.3 Q3.2 R1_EP_DR.2
RESET: J2.6 TP_RESET.TP U1.P$AC13
SCK: J1.13 U1.P$A12
SCL: IC1.B1 IC2.C1 IC3.12 R4.1 R17.2 TP_SCL.TP U1.P$M2 U3.7
SDA: IC1.C1 IC2.B2 IC3.2 R2.1 R18.2 TP_SDA.TP U1.P$L1 U3.8
SWDCLK: J2.4 TP_SWDCLK.TP U1.P$AA24
SWDIO: J2.2 TP_SWDIO.TP U1.P$AC24
SWO: TP_SWO.TP U1.P$AD22
VBAT [TRASEEPUTERE]: C27.2 C37.1 IC1.C2 TP_VBAT.TP U3.2 U3.3
VBUS [TRASEEPUTERE]: C21.1 C38.1 C42.1 C43.1 D3.5 IC1.A2 J4.A4_B9 J4.A9_B4 U1.P$AD2
VREG [TRASEEPUTERE]: C23.2 C24.2 C39.1 IC1.B2 IC9.A1 IC9.A2 IC9.A3 TP_VREG.TP

## Tracks (layer width: path | path; a pad name or v marks a point on that pad's centre or on a via)
3V3  (via drill 0.3, 0.35)
  Top 0.3: v20.75,22.65 19.4,22.65 C25.1 | TP_3.3V.TP 23.26,21.96 23.07,21.96 v22.75,22.29 22.55,22.49 IC9.E2 IC9.E3 | TP_3.3V.TP 24,21.4 v25.05,22.45 | C14.1 27.38,22.42 v26.47,22.42 | v26.25,19.55 26.6,19.2 U1.P$B1 | v25.8,14.05 C6.1 24.69,14.05 24.11,13.47 23.57,13.47 v23.25,13.15 | v9.85,7.2 9.7,7.05 R7.2 | R8.2 19.52,5.55 19.57,5.5 v19.05,5.5 | IC2.C2 v20,9.4 | v18.15,9.55 18.05,9.65 C19.2 | IC3.3 19.55,12.13 21.93,12.13 v22.1,12.3 R17.1 | v20.3,15.35 19.68,15.97 R18.1 TP_3V3.TP | TP_3.3V.TP 23.02,21.22 C33.1 | R_PWR_EPD.2 30.25,27.63 30.5,27.38 v30.5,27.15 31.69,28.34 Q1.2 32.64,29.58 37.38,29.58 37.8,29.16 37.8,27.7 37.45,27.35 C12.2 37.15,26.95 v37.15,26.65 | U1.P$A22 32.42,19.82 32.42,19.86 32.8,20.23 v32.8,20.5 | U1.P$Y2 27.05,14.7 U1.P$W1 26.8,14.23 v26.7,14.13 | v37.53,8.62 37.53,7.5 | R5.2 37.35,6.21 37.53,6.4 37.53,7.5 | C8.1 31.35,11.4 31.2,11.55 v30.5,11.55 | v30.5,11.55 30.05,11.1 C7.1 | v30.5,11.55 30.3,11.75 U1.P$AD14 | C19.2 18.26,10.5 17.93,10.84 IC3.10 | v18.95,13.85 18.28,13.18 18.18,13.18 18.02,13.01 18.02,12.8 IC3.7 | C34.1 17.27,8.83 17.27,9.52 C19.2 | U1.P$AD23 33.71,12.29 v34.7,12.29 | 37.53,7.5 37.63,7.5 38.93,8.8 41.16,8.8 J2.1
  Route15 0.3: v20.75,22.65 21.75,22.65 | 21.75,22.65 22.39,22.65 v22.75,22.29 | 25.85,22.45 v25.05,22.45 | 25.85,22.45 26.44,22.45 v26.47,22.42 | v26.25,19.55 25.5,20.3 25.5,22.1 25.85,22.45 | 26.15,14.05 v25.8,14.05 | v19.05,5.5 18.57,5.97 18.57,6.67 | v18.15,9.55 18.5,9.55 | 18.5,9.55 19.85,9.55 v20,9.4 20,10.2 v22.1,12.3 | v22.1,12.3 22.95,13.15 v23.25,13.15 | 21.75,22.65 20.3,21.2 v20.3,15.35 20.3,15.1 20.1,14.9 | 25.85,22.45 30.5,27.1 v30.5,27.15 | 32.78,20.58 32.8,20.55 v32.8,20.5 33.73,21.44 33.73,21.82 34.54,22.62 34.56,22.62 37.15,25.21 v37.15,26.65 | v22.1,12.3 20.1,14.3 20.1,14.9 | 20.1,14.9 19.05,13.85 v18.95,13.85 | v34.7,12.29 35.85,11.15 35.85,10.3 | 18.57,6.67 18.57,9.47 18.5,9.55 | 26.15,14.05 27.79,12.4 27.79,12.03 28.41,11.42 29.45,11.42 29.58,11.55 v30.5,11.55 32.85,9.2 34.75,9.2 35.85,10.3 | v26.7,14.13 26.61,14.05 26.15,14.05 | 18.57,6.67 18.04,7.21 11.37,7.21 11.36,7.2 v9.85,7.2 | v37.53,8.62 35.85,10.3
ALERT  (via drill 0.15)
  Top 0.15: v10.1,27.75 10.4,28.05 U3.5 | U1.P$J24 33.45,17.35 33.66,17.35 33.71,17.4 v34.3,17.4
  Bottom 0.15: v10.1,27.75 9.55,28.3 9.55,29.55 14.54,34.54 39.96,34.54 39.96,26.51 34.3,20.85 v34.3,17.4
D_N  (via drill 0.15)
  Top 0.15: D3.6 34.9,33.95 35.28,33.57 35.28,30.37 v35.08,30.17 | v34.77,22.07 35.43,21.4 v35.43,20.8 | v39.18,13.6 v39.18,12.7 | v27.05,3.97 24.52,6.5 v24.52,11.1 | v27.05,12.13 27.85,12.93 27.85,13.15 U1.P$AD4
  Bottom 0.15: v35.08,30.17 33.55,28.63 33.55,23 34.48,22.07 v34.77,22.07 | v35.43,20.8 35.43,18.42 38.98,14.87 38.98,13.8 v39.18,13.6 | v39.18,12.7 39.18,12.54 30.61,3.97 v27.05,3.97 | v24.52,11.1 25.55,12.13 v27.05,12.13
D_P  (via drill 0.15)
  Top 0.15: D3.4 34.25,32.05 34.8,31.5 34.8,30.85 v34.6,30.65 | v34.29,21.59 34.75,21.12 v34.75,20.8 | v38.5,13.6 v38.5,12.7 | v27.05,4.65 25.2,6.5 25.2,7.16 25.13,7.23 25.13,8.23 25.2,8.3 v25.2,11.1 | v27.05,11.45 28.13,12.53 28.13,13.15 28.18,13.2 U1.P$AD6
  Bottom 0.15: v34.6,30.65 33.27,29.32 33.27,22.89 34.29,21.87 v34.29,21.59 | v34.75,20.8 34.75,18.71 38.7,14.76 38.7,13.8 v38.5,13.6 | v38.5,12.7 38.5,12.25 30.9,4.65 v27.05,4.65 | v25.2,11.1 25.55,11.45 v27.05,11.45
DN
  Top 0.15: J4.A7 22.7,27.65 23.35,27 23.95,27 24.12,27.18 | 24.12,27.18 24.25,27.3 24.25,27.45 23.65,28.05 23.65,28.62 J4.B7 | D3.1 30.45,33.5 30.22,33.5 28.3,31.59 28.3,27.15 28.08,26.93 27.32,26.93 26.89,26.5 26,26.5 25.78,26.72 25.78,26.89 25.64,27.02 24.47,27.02 24.31,27.18 24.12,27.18
DP  (via drill 0.15 pad 0.3)
  Top 0.15: v22.5,27.25 22.3,27.45 22.3,28.57 J4.B6 | v23.2,27.7 J4.A6 | D3.3 29.68,32.05 v29.39,31.76
  Bottom 0.15: v22.5,27.25 22.78,27.52 | 22.78,27.52 22.95,27.7 v23.2,27.7 | v29.39,31.76 29.1,31.47 29.1,28.35 27.95,27.2 26.7,27.2 26.38,27.52 22.78,27.52
EPD_3V3  (via drill 0.35)
  Top 0.3: v11.45,15.95 11.1,15.6 J1.16 J1.15 | EPD_C5.2 14.1,16.95 v14.55,16.5 15.4,15.65 15.4,14.85 C1-EP-DR.1 | v12,33.6 10.83,33.6 9.81,32.58 9.81,31.72 L5.2 8.74,27.79 v8.95,27.58 | v29.7,30.65 30.66,30.65 Q1.3
  Route15 0.3: 9,27.45 9,18.4 v11.45,15.95 11.99,16.5 13.83,16.5 v14.55,16.5 | v29.7,30.65 28.07,32.28 13.2,32.28 9,28.08 9,27.45 | v8.95,27.58 8.95,27.5 9,27.45
EPD_BUSY  (via drill 0.15, 0.3)
  Top 0.15: v29.75,12.25 29.75,13.15 U1.P$AD12 | J1.9 10.72,19.25 11.8,19.25 v12.05,19.5
  Bottom 0.15: v12.05,19.5 11.75,19.5 11.13,18.88 11.13,17.02 12.07,16.08 12.07,6.53 14.25,4.35 21.85,4.35 v29.75,12.25
EPD_CS  (via drill 0.15)
  Top 0.15: J1.12 12.35,17.6 12.47,17.48 13.28,17.48 v13.6,17.8
  Bottom 0.15: v13.6,17.8 26.45,17.8 U1.P$K2
  other vias: 27.3,16.95
EPD_DC  (via drill 0.15)
  Top 0.15: v12.12,18.01 12.02,18.1 J1.11 | v28.88,11.97 28.88,12.13 29.3,12.56 U1.P$AD10
  Bottom 0.15: v28.88,11.97 28.88,11.88 21.63,4.63 14.37,4.63 12.35,6.65 12.35,16.85 12.35,17.78 v12.12,18.01
EPD_RST  (via drill 0.15, 0.3)
  Top 0.15: v11.6,18.57 11.57,18.6 J1.10 | U1.P$AC11
  Bottom 0.15: U1.P$AC11 29.72,13.52 21.15,4.95 14.65,4.95 13.15,6.45 13.15,17.98 12.79,18.35 12.75,18.35 12.46,18.64 11.68,18.64 v11.6,18.57
  other vias: 29.55,13.69
GDR  (via drill 0.3)
  Top 0.15: R2_EP_DR.2 6.53,26.93 v6.6,26.85 | v11.55,25.2 11.95,24.8 Q3.1 11.13,23.53 11.13,22.87 11.01,22.75 10.72,22.75 J1.2
  Bottom 0.15: v6.6,26.85 7.2,26.25 7.34,26.25 8.39,25.2 v11.55,25.2
GND  (via drill 0.15)
  Top 0.15: J1.17 v11.5,15.1 | EPD_C6.1 14.45,15.75 v14.6,15.6 | EPD_C10.1 14.3,10.6 v14.35,10.65 | EPD_C9.1 14.1,11.9 v14.3,11.7 | EPD_C8.1 13.95,13.2 v14.3,12.85 | EPD_C7.1 14.35,14.05 v14.35,13.65 | C1-EP-DR.2 v16,13.55 | IC3.8 17.78,12.35 17.67,12.35 17.45,12.56 v17.45,13.5 | C19.1 16.75,9.6 v16.05,9.6 | C34.2 16.7,8.7 v15.9,8.7 | EPD_C11.1 13.8,9.2 v14.35,8.65 | EPD_C12.1 10.75,8.6 v10.8,8.55 | J1.MP2 8.29,10.45 v9,10.45 | SW_DN.1 14.18,4.07 v15.05,3.2 | C29.2 11.6,6.5 v11.6,6.65 | SW_ENT.1 25.53,4.07 v25.9,3.7 | TP_GND.TP 27.7,6.25 v27.25,5.8 | C30.1 30.15,3.15 v30.15,2.7 | C7.2 30.6,9.34 v30.6,9.1 | C21.2 28.25,9.4 v28.2,9.35 | C22.1 39.15,17.6 v39.15,17.15 | C4.1 38.3,17.5 v38.6,17.8 | C3.1 36.6,17.95 v36.85,18.2 | C9.1 35.35,15.8 v35.85,16.3 | C10.1 v39.2,21.3 | C11.1 39.7,23.95 v39.1,23.35 | C2.2 39.55,25.45 v38.8,24.7 | C1.2 39.05,29.01 v39.05,29.5 | X1.4 41.23,30.48 v41.45,30.7 | X1.2 43.25,27.65 v44.05,27.65 | C12.1 36.4,27.96 v36.05,28.3 | C13.1 35.2,27.71 v34.6,28.3 | C16.1 34,27.8 v34.05,27.85 | C15.2 32.4,26.9 v32.7,27.2 | R1_USB.1 25.75,27.4 v26.15,27 | C23.1 22.5,25.7 v22.15,25.7 | IC9.B1 22.1,24.3 v21.55,24.3 | v24,24.35 23.63,24.35 23.32,24.04 23.04,24.04 IC9.C3 IC9.C2 IC9.C1 | C25.2 18.5,22.85 v18.5,22.55 | C38.2 17.6,21.9 v18.1,21.4 | D4.1 15.25,20.25 v15.25,21 | EPD_C1.1 v14.75,21.45 | EPD_C2.1 13.65,22.05 v13.65,22.85 | C39.2 15,24.95 v14.3,25.65 | C37.2 13.7,28.6 v13.7,27.85 | v13.6,30.85 13.6,30.07 C27.1 | U3.1 12.83,30.88 v12.85,30.9 | U3.9 11.49,29.55 v12.75,29.55 | U3.6 10.95,28.86 v10.95,27.8 | SJ1.1 10.25,25.21 v10.25,24 | R2_EP_DR.1 5.53,26.6 5.49,26.6 5.1,26.99 v5.1,27.1 | R_TYPE_SEL.1 3.18,27 v3.8,27 | U3.4 10.56,31.04 10.56,31.32 10.6,31.36 v10.6,31.9
  Top 0.15: TP_BAT_GND.TP 16.4,33.55 v16.8,33.15 | R9.1 16.97,28.98 v17.1,29.1 | IC1.D2 16.95,27.55 v16.85,27.65 | C43.2 18.75,26.75 v18.75,26.2 | R3.1 22.15,10.97 v22.15,11.45 | C20.2 23.6,11.6 v23.6,11.4 | C32.1 23.7,10.2 v23.9,10.4 | C31.1 24.4,5.7 v24.45,5.65 | SW_UP.1 36.37,4.07 v36.4,4.1 | U1.P$B7 28.25,19.5 v28.25,20 | v23.15,19.35 22.45,19.35 C33.2 | C5.2 23.6,19.7 23.33,19.97 v23.27,19.97 | C17.1 22.05,17.9 v22.05,17.35 | C18.1 21.95,16 v21.55,16.4 | C6.2 23.65,14.8 v23.7,14.85 | C14.2 27.85,21.6 v27.8,21.6 | EPD_C5.1 13,18.8 v12.9,18.7 | J2.5 41,6.1 40.75,6.1 40.1,5.45 v40,5.45 | v21.13,10.33 21.15,10.3 IC2.B1 | v7.4,25.05 7.46,24.99 7.46,24.35 J1.MP1 | R2_USB.2 21.97,26.89 v21.9,26.81 | J1.8 10.72,19.75 11.01,19.75 11.16,19.9 v11.33,19.9 | J2.3 41.96,7.33 v41.96,7.22 | U1.P$79 U1.P$80 | U1.P$74 U1.P$85 U1.P$80 | U1.P$74 U1.P$84 | 31.25,16.45 U1.P$82 | U1.P$74 U1.P$90 | U1.P$74 U1.P$78 | U1.P$74 U1.P$81 U1.P$77 | U1.P$74 U1.P$80 | U1.P$80 U1.P$76 | U1.P$74 U1.P$75 | 30.05,15.25 U1.P$88 | U1.P$74 30.05,15.25 | 30.05,15.25 U1.P$89 | U1.P$74 U1.P$87 | U1.P$74 31.25,16.45 | 31.25,16.45 U1.P$86 | U1.P$74 28.85,16.45 U1.P$83
  Top 0.152: IC3.9 17.78,11.55 17.67,11.55 17.36,11.25 v17.3,11.25
  other vias: 32.8,17.95 26.15,28.68
  pour Top: 36.31,1.69 36.33,1.67 36.33,-0.03 36.35,-0.07 39.4,-0.07 40.19,-0.01 40.97,0.14 41.73,0.38 42.45,0.71 43.13,1.12 43.76,1.61 44.33,2.16 44.83,2.79 45.25,3.46 45.59,4.18 45.84,4.93 46,5.71 46.07,6.5 46.17,28.35 46.13,29.15 45.99,29.93 45.77,30.7 45.45,31.43 45.05,32.13 44.57,32.77 44.03,33.34 43.41,33.86 42.74,34.29 42.03,34.65 41.28,34.92 40.5,35.09 39.7,35.18 38.92,35.17 38.92,35.17 38.9,35.17 38.89,35.17 38.89,35.17 16.2,35.12 7,35.07 6.18,35.02 5.37,34.87 4.58,34.63 3.82,34.3 3.11,33.88 2.45,33.39 1.86,32.82 1.33,32.18 0.89,31.49 0.52,30.75 0.25,29.97 0.06,29.17 -0.02,28.35 -0.02,24.38 6.9,24.33 6.92,24.33 6.92,24.33 6.92,24.33 6.93,24.32 6.94,24.31 6.94,24.31 6.94,24.31 6.95,24.3 6.96,24.29 6.96,24.29 6.96,24.29 6.97,24.28 6.98,24.26 6.98,24.26 6.98,24.26 6.98,24.25 6.93,10.75 6.93,10.74 6.93,10.73 6.93,10.73 6.92,10.72 6.91,10.71 6.91,10.71 6.91,10.71 6.9,10.7 6.89,10.69 6.89,10.69 6.89,10.69 6.88,10.68 6.87,10.67 6.87,10.67 6.86,10.67 6.85,10.67 -0.02,10.62 -0.02,10.62 -0.12,6.9 -0.1,6.12 0.01,5.35 0.21,4.6 0.5,3.87 0.87,3.18 1.31,2.54 1.83,1.96 2.4,1.44 3.04,0.98 3.72,0.61 4.44,0.31 5.19,0.1 5.96,-0.02 9.67,-0.07 9.67,1.5 9.67,1.51 9.67,1.51 9.67,1.52 9.68,1.53 9.68,1.54 9.69,1.54 9.69,1.54 9.7,1.55 9.71,1.56 9.71,1.56 9.71,1.56 9.72,1.57 9.73,1.58 9.73,1.58 9.73,1.58 9.75,1.58 14.19,1.68 14.19,1.68 14.2,1.68 14.21,1.68 14.22,1.68 14.22,1.68 14.23,1.67 14.24,1.67 14.24,1.66 14.24,1.66 14.25,1.65 14.26,1.64 14.26,1.64 14.27,1.64 14.27,1.63 14.28,1.62 14.28,1.61 14.28,1.61 14.28,1.6 14.28,1.59 14.28,1.58 14.23,-0.07 20.6,-0.12 20.67,0.02 20.67,1.62 20.69,1.64 20.71,1.66 20.73,1.68 25.2,1.68 25.21,1.68 25.21,1.68 25.22,1.68 25.23,1.67 25.24,1.67 25.24,1.67 25.24,1.66 25.25,1.65 25.26,1.64 25.26,1.64 25.26,1.64 25.27,1.63 25.28,1.62 25.28,1.62 25.28,1.62 25.28,1.6 25.32,-0.07 31.65,-0.07 31.67,0.01 31.67,1.67 31.69,1.69 31.71,1.71 31.73,1.73 36.27,1.73 36.29,1.71
  pour Route2: 6.02,-0.02 6.04,-0.04 6.18,-0.17 9.77,-0.17 9.77,-0.17 9.77,1.37 9.74,1.41 9.72,1.43 9.72,1.47 9.74,1.49 9.76,1.51 9.78,1.53 14.07,1.53 14.11,1.56 14.13,1.58 14.17,1.58 14.19,1.56 14.21,1.54 14.23,1.52 14.23,-0.12 20.72,-0.12 20.72,1.52 20.74,1.54 20.76,1.56 20.78,1.58 25.07,1.58 25.07,1.62 25.09,1.64 25.11,1.66 25.13,1.68 25.17,1.68 25.19,1.66 25.21,1.64 25.23,1.62 25.23,-0.07 31.67,-0.07 31.67,0.02 31.69,0.04 31.71,0.06 31.72,0.07 31.72,1.62 31.74,1.64 31.76,1.66 31.78,1.68 36.17,1.68 36.19,1.66 36.21,1.64 36.23,1.62 36.23,-0.17 39.45,-0.17 40.26,-0.12 41.05,0.02 41.82,0.26 42.56,0.6 43.24,1.02 43.88,1.52 44.44,2.1 44.94,2.74 45.35,3.43 45.67,4.17 45.9,4.95 46.04,5.74 46.07,6.55 46.22,28.7 46.18,29.48 46.05,30.24 45.83,30.98 45.52,31.7 45.12,32.37 44.65,32.98 44.11,33.54 43.51,34.03 42.85,34.45 42.15,34.78 41.42,35.03 40.66,35.18 39.88,35.25 39.12,35.22 39.12,35.22 39.1,35.22 39.09,35.22 39.09,35.22 28.91,35.17 28.91,35.17 28.9,35.17 28.89,35.17 28.88,35.17 24.55,35.27 6.85,35.27 6.02,35.22 5.2,35.07 4.41,34.83 3.65,34.49 2.93,34.06 2.28,33.55 1.69,32.97 1.17,32.31 0.73,31.61 0.39,30.85 0.13,30.06 -0.02,29.24 -0.02,24.23 6.87,24.23 6.89,24.21 6.91,24.19 6.93,24.17 6.93,10.83 6.91,10.81 6.89,10.79 6.87,10.77 -0.07,10.77 -0.17,10.67 -0.17,6.5 -0.12,5.7 0.02,4.9 0.27,4.14 0.6,3.4 1.03,2.72 1.53,2.09 2.11,1.53 2.75,1.04 3.45,0.64 4.19,0.32 4.96,0.1 5.76,-0.02
  pour Bottom: 6.1,-0.17 9.75,-0.17 9.77,-0.09 9.82,1.4 9.82,1.41 9.82,1.42 9.82,1.42 9.83,1.43 9.83,1.44 9.84,1.44 9.84,1.45 9.85,1.45 9.86,1.46 9.86,1.46 9.86,1.47 9.87,1.47 9.88,1.48 9.89,1.48 9.89,1.48 9.9,1.48 14.1,1.53 14.11,1.53 14.11,1.53 14.11,1.53 14.13,1.52 14.14,1.52 14.14,1.52 14.14,1.52 14.15,1.51 14.16,1.5 14.16,1.5 14.16,1.49 14.17,1.48 14.18,1.47 14.18,1.47 14.18,1.47 14.18,1.45 14.27,-0.17 20.66,-0.17 20.77,0.02 20.77,1.52 20.79,1.54 20.81,1.56 20.83,1.58 25.1,1.58 25.11,1.58 25.11,1.58 25.12,1.58 25.13,1.57 25.14,1.57 25.14,1.57 25.14,1.56 25.15,1.55 25.16,1.55 25.16,1.54 25.16,1.54 25.17,1.53 25.18,1.52 25.18,1.52 25.18,1.52 25.18,1.5 25.22,-0.12 31.72,-0.07 31.72,1.57 31.74,1.59 31.76,1.61 31.78,1.63 36.1,1.63 36.11,1.63 36.11,1.63 36.12,1.63 36.13,1.62 36.14,1.62 36.14,1.62 36.14,1.61 36.15,1.6 36.16,1.6 36.16,1.59 36.16,1.59 36.17,1.58 36.18,1.57 36.18,1.57 36.18,1.57 36.18,1.55 36.22,-0.08 39.6,-0.17 40.33,-0.15 41.05,-0.05 41.76,0.14 42.44,0.41 43.08,0.75 43.68,1.16 44.23,1.65 44.72,2.19 45.15,2.78 45.5,3.42 45.78,4.1 45.98,4.8 46.09,5.52 46.12,6.25 46.32,28.4 46.29,29.19 46.16,29.98 45.94,30.74 45.63,31.47 45.24,32.16 44.78,32.81 44.24,33.39 43.65,33.91 42.99,34.36 42.29,34.73 41.55,35.02 40.78,35.21 40,35.32 30.82,35.22 30.81,35.22 30.8,35.22 30.79,35.22 30.78,35.22 24.25,35.27 6.2,35.27 5.44,35.23 4.7,35.09 3.98,34.87 3.28,34.56 2.64,34.16 2.04,33.7 1.5,33.16 1.04,32.56 0.64,31.92 0.33,31.22 0.11,30.5 -0.03,29.76 -0.07,29 -0.12,24.18 6.8,24.18 6.81,24.18 6.82,24.18 6.82,24.18 6.83,24.17 6.84,24.16 6.84,24.16 6.84,24.16 6.85,24.15 6.86,24.14 6.86,24.14 6.86,24.14 6.87,24.13 6.88,24.12 6.88,24.12 6.88,24.12 6.88,24.1 6.93,10.87 6.93,10.86 6.93,10.85 6.93,10.84 6.93,10.83 6.93,10.83 6.92,10.82 6.91,10.81 6.91,10.81 6.91,10.81 6.9,10.8 6.89,10.79 6.89,10.79 6.89,10.79 6.88,10.78 6.87,10.77 6.87,10.77 6.86,10.77 6.85,10.77 6.84,10.77 6.83,10.77 -0.06,10.82 -0.17,10.67 -0.22,5.95 -0.18,5.19 -0.05,4.45 0.17,3.73 0.49,3.04 0.88,2.39 1.36,1.8 1.9,1.27 2.51,0.82 3.16,0.44 3.86,0.15 4.59,-0.05 5.34,-0.16
HAPTIC_EN  (via drill 0.15)
  Top 0.15: v22.75,10.95 21.7,9.9 IC2.A1
  Bottom 0.15: U1.P$U1 26.2,15.2 22.75,11.75 v22.75,10.95
  other vias: 26.8,15.2
LX1  (via drill 0.15)
  Top 0.15: IC9.B2 IC9.B3 23,24.4 23.29,24.4 23.94,25.05 v24.14,25.05 | v27.08,25.9 27.31,26.13 L7.1
  Bottom 0.15: v27.08,25.9 25.05,25.9 24.2,25.05 v24.14,25.05
LX2
  Top 0.15: IC9.D2 IC9.D3 24.97,23.55 25.05,23.47 27.89,23.47 L7.2
MOSI  (via drill 0.15)
  Top 0.15: v14.85,17.25 15,17.4 v15,18.27 | v13.6,17.05 13.15,16.6 J1.14
  Bottom 0.15: v14.85,17.25 14.65,17.05 v13.6,17.05 | v15,18.27 15.13,18.4 23.5,18.4 25.1,20 27.75,20 28.1,20.35 28.4,20.35 28.75,20 29.25,20 U1.P$B13
  other vias: 30.05,19.2
N$1
  Top 0.15: R1_USB.2 24.73,27.9 24.47,27.9 24.2,28.16 J4.A5
N$2
  Top 0.15: J4.B5 21.35,28.53 21.35,28.02 21.43,27.94 R2_USB.1
N$3
  Top 0.15: L1.1 41.4,21.85 38.85,19.3 36.79,19.3 35.75,18.26 35.75,18.16 C3.2 33.68,17.95 33.62,17.9 33.25,17.9 U1.P$H23
N$4
  Top 0.15: C4.2 38.5,18.71 C22.2 40.75,18.71 ANT1.1 41.25,19.26 41.1,19.42 41.1,20.8 L1.2
N$6  (via drill 0.3)
  Top 0.15: L5.1 7.69,27.13 9.14,27.13 9.31,27.3 C2-EP-DR.2 14.05,23.95 Q3.3 14.65,23.1 v14.65,22.65 | D5.2 16.45,16.15 16.45,19.66 16.29,19.82 v16.29,20.9
  Bottom 0.15: v14.65,22.65 16.2,21.1 16.2,20.99 v16.29,20.9
N$8
  Top 0.15: C11.2 40.1,23.79 40.1,23.69 35.06,18.65 33.33,18.65 33.12,18.45 U1.P$D23
N$9  (via drill 0.35)
  other vias: 45.1,19.7
N$10
  Top 0.15: X1.3 42.41,29.38 41.78,28.75 41.75,28.75 X1.1 41.1,28.1 C1.1 40.16,27.29 C2.1 39.95,25.34 39.95,25.03 36.27,21.35 36.27,21.13 34.33,19.2 U1.P$B24
N$11  (via drill 0.35)
  other vias: 43.33,19.65
N$12
  Top 0.15: EPD_C6.2 12.65,15.25 12,14.6 J1.18
N$13
  Top 0.15: EPD_C7.2 12.6,14.1 J1.19
N$14
  Top 0.15: J1.20 10.72,13.45 11.01,13.45 11.26,13.2 EPD_C8.2
N$15  (via drill 0.3)
  Top 0.15: v16.45,23.6 15.7,23.6 D4.2 15.55,23.25 v16.65,22.15 | v17.2,21 17.15,20.95 D2.1 | C2-EP-DR.1 13.35,25.95 13.35,25.44 v13.67,25.12
  Bottom 0.15: v16.65,22.15 17.2,21.6 v17.2,21 | v13.67,25.12 15.18,23.6 v16.45,23.6
N$16  (via drill 0.35)
  other vias: 44.22,19.65
N$17
  Top 0.15: U1.P$N24 34.15,16.2 C9.2
N$18
  Top 0.15: J1.4 12.4,21.6 EPD_C2.2
N$19  (via drill 0.15)
  Top 0.15: U1.P$B3 27.4,19.35 v27.4,20.9 | v33.05,22.3 33.65,22.9 L2.1
  Bottom 0.15: v27.4,20.9 27.6,21.1 31.85,21.1 v33.05,22.3
N$20
  Top 0.15: J1.5 11.49,21.1 11.67,21.28 12.32,21.28 EPD_C1.2
N$21  (via drill 0.35)
  other vias: 42.45,19.65
N$22  (via drill 0.3)
  Top 0.15: R_TYPE_SEL.2 3.95,26.23 R1_EP_DR.1 5.11,25.73 v5.25,25.86 | 8.26,25.78 8.39,25.65 SJ1.2 8.14,25.8 v7.15,25.8
  Bottom 0.15: v5.25,25.86 5.31,25.8 v7.15,25.8
N$23
  Top 0.15: EPD_C10.2 12.3,10.88 11.73,11.45 11.73,11.73 11.01,12.45 10.72,12.45 J1.22
N$24  (via drill 0.35)
  other vias: 41.55,19.61
N$25
  Top 0.15: EPD_C12.2 10.57,10.92 J1.24
N$28
  Top 0.15: IC1.D1 17.35,28.23 R9.2
N$29
  Top 0.15: R4.2 22.12,23.58 IC9.D1
N$30
  Top 0.15: R2.2 21.87,22.15 21.91,22.15 22.15,22.39 IC9.E1
N$31
  Top 0.15: IC3.1 19.75,11.2 20.1,10.85 R3.2
N$32
  Top 0.15: C5.1 25.65,19 26.23,19 26.54,18.7 U1.P$C1
N$33
  Top 0.15: C17.2 24.95,18 X2\.1 27.15,18.3 U1.P$D2
N$34
  Top 0.15: U1.P$AC5 27.48,13.7 27.43,13.65 26.54,13.65 25.35,12.46 C20.1
N$35
  Top 0.15: C18.2 25.05,16 X2\.2 25.25,16.75 26.1,17.6 26.23,17.6 26.64,18 26.93,18 26.98,17.95 U1.P$F2
N$36  (via drill 0.35)
  other vias: 45.35,17.05
N$37  (via drill 0.35)
  other vias: 44.45,16.79
N$38  (via drill 0.35)
  other vias: 43.55,16.79
N$39
  Top 0.15: IC2.A2 22.35,9.4 C32.2
N$40  (via drill 0.15)
  Top 0.15: L3.1 30.2,22.35 v30.95,22.35 | v32.65,23.65 33.1,24.1 L2.2
  Bottom 0.15: v30.95,22.35 32.25,23.65 v32.65,23.65
N$41  (via drill 0.15)
  Top 0.15: C10.2 v37.12,19.83 36.87,19.58 36.46,19.58 35.26,18.38 33.71,18.38 33.54,18.2 U1.P$E24 | U1.P$B5 27.75,19.5 27.75,20.61 29.15,22.02 29.15,22.3 L3.2 30.15,23.42 v30.69,23.96 | v32.25,24.3 32.25,24.95 C15.1 32.71,25.1 C16.2 34,26.15 v34.4,25.75 | v36.05,24.9 35.91,24.76 v35.91,21.5
  Bottom 0.15: v32.25,24.3 32.15,24.2 30.93,24.2 v30.69,23.96 | v36.05,24.9 35.2,25.75 v34.4,25.75 | v37.12,19.83 35.91,21.04 v35.91,21.5
N$42  (via drill 0.35)
  other vias: 41.78,16.79
N$43  (via drill 0.35)
  other vias: 42.66,16.75
N$44  (via drill 0.35)
  other vias: 40.9,16.65
N$45  (via drill 0.35)
  other vias: 40.17,17.24
N$47  (via drill 0.35)
  other vias: 40.33,19.47
N$52
  Top 0.15: C13.2 35.3,23.7 U1.P$A18
OUT+
  Top 0.15: IC2.A3 21.95,8.9 TP_OP.TP
OUT-
  Top 0.15: IC2.C3 20.65,7.3 TP_ON.TP
P0.13
  Top 0.152: U1.P$AD8 28.8,12.45 27.6,11.25 27.6,11.05 27.75,10.9 28.9,10.9 29.15,10.65 29.15,9.75 30.75,8.15 30.75,4.85 C30.2 31.92,4.7 SW_UP.2 33.05,4.57 33.05,4.85 33.17,4.97 36.75,4.97 R5.1
P0.14  (via drill 0.15 pad 0.3)
  Top 0.15: C31.2 20.93,5.7 R8.1 21.05,5.27 21.05,4.57 SW_ENT.2 21.55,4.35 22.3,5.1 v25.3,5.1
  Bottom 0.15: U1.P$AC9 29.35,14 30.7,14 31.15,13.55 31.15,10.96 26.09,5.89 v25.3,5.1
  other vias: 29.05,13.7
P1.01  (via drill 0.15 pad 0.3)
  Top 0.15: Q1.1 29.79,27.9 29.78,27.89 29.78,27.85 R_PWR_EPD.1 29.78,27.41 29.78,27.23 31.55,25.46 31.55,20.75 v31.6,20.7
  Bottom 0.15: U1.P$Y23 32.46,14.79 32.46,19.84 v31.6,20.7
  other vias: 32.8,14.45
P1.02  (via drill 0.15 pad 0.3)
  Top 0.15: R7.1 8.42,4.72 v8.9,4.25 9.08,4.07 SW_DN.2 10.25,4.37 10.25,4.67 10.16,4.76 C29.1
  Bottom 0.15: v8.9,4.25 13.96,4.25 14.13,4.08 21.97,4.08 22.14,4.25 25.45,4.25 25.45,4.75 26.36,5.66 26.36,5.78 31.43,10.84 31.43,11.93 32.25,12.75 33.8,12.75 34.2,13.15 34.2,14.55 34.05,14.7 U1.P$W24
  other vias: 33.3,14.7
P1.09  (via drill 0.15)
  Top 0.15: v35,13.63 35,12.9 v36.39,11.51 | v29.9,8.35 27.76,8.35 v25.81,10.3
  Bottom 0.15: U1.P$R1 26.58,15.48 24.94,15.48 22.91,13.45 21.55,13.45 21,12.9 21,11.75 22.15,10.6 23.55,10.6 23.75,10.8 24.05,10.8 24.25,10.6 25.52,10.6 v25.81,10.3 | v35.05,16.6 35,16.55 v35,13.63 | v29.9,8.35 32.55,8.35 32.65,8.25 32.95,8.25 36.21,11.51 v36.39,11.51
  other vias: 26.8,15.7
PREVGH
  Top 0.15: J1.21 10.72,12.95 11.01,12.95 11.58,12.38 | EPD_C9.2 12.06,11.9 11.58,12.38 | D5.1 13.84,12.35 13.78,12.4 13.02,12.4 12.99,12.38 11.58,12.38
PREVGL
  Top 0.15: J1.23 10.72,11.95 11.01,11.95 11.45,11.51 11.45,9.2 EPD_C11.2 12.51,9.2 13.02,9.7 14.91,9.7 16.92,11.71 16.92,15.62 17.15,15.85 D2.2
RESE  (via drill 0.3)
  Top 0.15: v9.7,22.3 9.9,22.1 J1.3 11,22.1 Q3.2 | R1_EP_DR.2 4.98,25.18 5.12,25.03 v5.25,25.03
  Bottom 0.15: v5.25,25.03 5.37,24.9 7.04,24.9 7.25,24.7 7.3,24.7 v9.7,22.3
RESET  (via drill 0.15)
  Top 0.15: 31.68,11.62 v30.75,12.55 | v31.45,7.25 31.6,7.25 31.78,7.43 31.78,11.52 31.68,11.62 | v29.85,7.55 26.51,7.55 TP_RESET.TP | v32.3,12.1 32.15,12.1 31.68,11.62 | v42.83,11.82 41.68,11.82 v41.25,11.4 | v42.15,5.95 42.15,5.98 J2.6
  Bottom 0.15: U1.P$AC13 30.75,13 v30.75,12.55 | v31.45,7.25 30.15,7.25 v29.85,7.55 | v32.3,12.1 32.5,11.9 33.67,11.9 34.92,13.15 41.55,13.15 42.85,11.85 v42.83,11.82 | v42.15,5.95 42.15,6.9 42.32,7.07 42.32,7.36 41.25,8.43 v41.25,11.4
  other vias: 30.05,13.7
SCK  (via drill 0.15)
  Top 0.15: U1.P$A12 29.7,19.8 v29.7,20.35 | v13.65,18.75 12.8,17.9 v12.8,17.83 | v12.7,17.05 10.62,17.05 J1.13
  Bottom 0.15: v13.65,18.75 23.15,18.75 24.68,20.28 27.64,20.28 27.99,20.63 28.51,20.63 28.79,20.35 v29.7,20.35 | v12.7,17.05 12.7,17.55 12.8,17.65 v12.8,17.83
SCL  (via drill 0.15, 0.15 pad 0.3)
  Top 0.15: R17.2 21.27,13.78 21.05,14 21.05,16.55 20.4,17.2 20.4,19.45 TP_SCL.TP 19.4,20.45 v19.4,20.9 | R17.2 22.57,14.25 v22.6,14.25 | IC2.C1 19.85,9.9 v19.18,10.57 18.95,10.8 IC3.12 | R4.1 19.95,24.12 | 19.95,24.12 19.71,24.12 19.34,24.5 18.62,24.5 v17.78,25.33 17.65,25.46 17.65,25.93 17.47,26.1 17.45,26.1 IC1.B1 | 19.95,24.12 20.1,23.98 v20.1,23.21 | U3.7 11.4,28.3 v12.25,27.45 | R17.2 21.88,13.55 21.84,13.55 21.24,12.95 v20.05,12.95
  Bottom 0.15: v20.1,23.21 20.1,21.6 v19.4,20.9 | v17.78,25.33 17.75,25.3 15.15,25.3 13,27.45 v12.25,27.45 | v20.05,12.95 19.18,12.07 v19.18,10.57 | v22.6,14.25 23.25,14.9 23.25,15 24.7,16.45 U1.P$M2
  other vias: 27.3,16.45
SDA  (via drill 0.15, 0.15 pad 0.3)
  Top 0.15: U1.P$L1 26.4,16.7 v26.15,16.95 | 18.9,15.1 v18.9,14.75 19.75,13.9 v19.75,13.65 | 18.9,15.1 18.9,15.28 R18.2 | v20.25,11.5 20.05,11.7 IC3.2 | U3.8 13.96,26.85 v15.05,26.85 | IC1.C1 17.45,26.5 17.75,26.5 v18,26.25 | v21.4,23.21 21.65,22.96 R2.1 | v20.9,17.35 21.43,17.88 v21.43,20.4 | v18.36,15.4 18.65,15.1 18.9,15.1 | v37.2,29.15 36.85,28.8 v32.79,28.8 | v38.7,30.8 38.7,31.75 TP_SDA.TP
  Bottom 0.15: v26.15,16.95 21.1,16.95 v18.9,14.75 | 20.25,11.9 v20.25,11.5 | 18.05,26.3 20.5,23.85 | 20.5,23.85 21,23.35 | 21,23.35 21.14,23.21 v21.4,23.21 | 21,23.35 21,23.04 21.2,22.84 21.2,20.63 v21.43,20.4 | v20.9,17.35 19.55,16 18.5,16 18.36,15.86 v18.36,15.4 | v19.75,13.65 20.1,13.3 20.2,13.3 20.41,13.1 20.41,12.8 20.25,12.64 20.25,11.9 | v37.2,29.15 37.2,29.3 v38.7,30.8 | 20.5,23.85 27.84,23.85 v32.79,28.8 | v15.05,26.85 15.79,26.85 15.95,26.69 17.66,26.69 18.05,26.3 | 18.05,26.3 v18,26.25 | 20.25,11.9 20.75,11.4 20.75,10.21 21.15,9.8 IC2.B2
  other vias: 21.15,9.4
SWDCLK  (via drill 0.15)
  Top 0.15: U1.P$AA24 34.55,14.2 36.1,15.75 TP_SWDCLK.TP 41.3,12.6 v41.3,12.25 | v43.82,8.79 42.87,7.83 J2.4
  Bottom 0.15: v41.3,12.25 42.37,11.18 42.44,11.18 42.91,10.71 42.91,9.94 43.82,9.03 v43.82,8.79
SWDIO
  Top 0.15: U1.P$AC24 34.57,13.7 34.85,13.98 36.37,13.98 TP_SWDIO.TP 38.48,11.87 40.18,11.87 41.01,11.05 41.63,11.05 41.77,11.18 42.44,11.18 42.91,10.71 42.91,10.68 43.14,10.45 43.14,9.51 J2.2
SWO
  Top 0.152: U1.P$AD22 33.25,12.25 TP_SWO.TP
VBAT  (via drill 0.3 pad 0.5, 0.35)
  Top 0.2: IC1.C2 16.5,26.6
  Top 0.3: 16.5,26.6 16.25,26.85 16.25,27.03 v16.14,27.14 | TP_VBAT.TP 16.7,31.1 v15.8,30.2 15.65,30.05 C27.2 14.69,28.89 C37.1 | 10.9,30.84 U3.3 U3.2 11.4,31.26 11.76,31.63 v13.47,31.63
  Route15 0.3: v13.47,31.63 14.32,31.63 15.5,30.45 15.8,30.45 v15.8,30.2 16.14,29.86 v16.14,27.14
VBUS  (via drill 0.15, 0.3, 0.3 pad 0.3, 0.35)
  Top 0.3: J4.A9_B4 20.65,28.58 v20.65,27.4 | C42.1 24.53,26.6 v24.5,26.57 | C38.1 17.6,24.35 | 17.6,24.35 16.95,25 IC1.A2 | v20.5,26.61 20,26.61 C43.1 | U1.P$AD2 27.3,13.15 26.85,13.15 v26.5,12.8 26.5,11.1 C21.1 | D3.5 33.65,32.75 v34.75,32.75 | 17.6,24.35 v17.65,24.4 | J4.A4_B9 25.57,28.45 25.57,27.99 25.81,27.75 26.15,27.75 26.32,27.58 v27.79,27.58
  Route15 0.3: v20.65,27.4 20.65,26.76 v20.5,26.61 | 24.39,22.86 24.39,23.11 24.7,23.42 24.7,26.35 24.5,26.55 | 24.39,22.86 24.39,22.72 | 24.39,22.72 24.39,14.33 25.92,12.8 v26.5,12.8 | 24.39,22.72 27.02,25.35 27.31,25.35 34.72,32.75 v34.75,32.75 | 24.39,22.86 26.53,25 26.53,26.32 v27.79,27.58 | v24.5,26.57 24.5,26.55 | v20.65,27.4 21.34,26.71 21.34,26.52 21.61,26.26 22.19,26.26 22.48,26.55 24.5,26.55 | v17.65,24.4 18.89,25.65 18.98,25.65 19.3,25.97 19.3,26.05 v20.65,27.4
VREG  (via drill 0.3 pad 0.3, 0.35)
  Top 0.2: IC1.B2 16.25,26.2 16.05,26.2
  Top 0.3: C24.2 20.15,25.05 20.15,25.57 v20.33,25.75 | 16.25,25 16.1,24.85 C39.1 16.1,26.05 16.25,26.2 | v23.96,25.91 23.92,25.95 C23.2 24.4,25.95 25.55,24.8 TP_VREG.TP | v23.35,25.1 23.3,25.1 IC9.A3 IC9.A2 IC9.A1 21.99,24.75 v21.68,25.06 | 16.05,26.2 15.94,26.31 15.36,26.31 v15.11,26.07
  Route15 0.3: v23.35,25.1 23.35,25.3 v23.96,25.91 | 20.95,25.6 20.8,25.75 v20.33,25.75 | 20.95,25.6 20.65,25.6 18.1,23.05 15.11,26.04 v15.11,26.07 | 20.95,25.6 21.49,25.06 v21.68,25.06
(copper drawn outside any net)
  shapes: Bottom area x1, Route2 area x1, Top area x1